# EAGLE board SPARK_PCB_2025_BRD_2 (EAGLE 9.7.0)
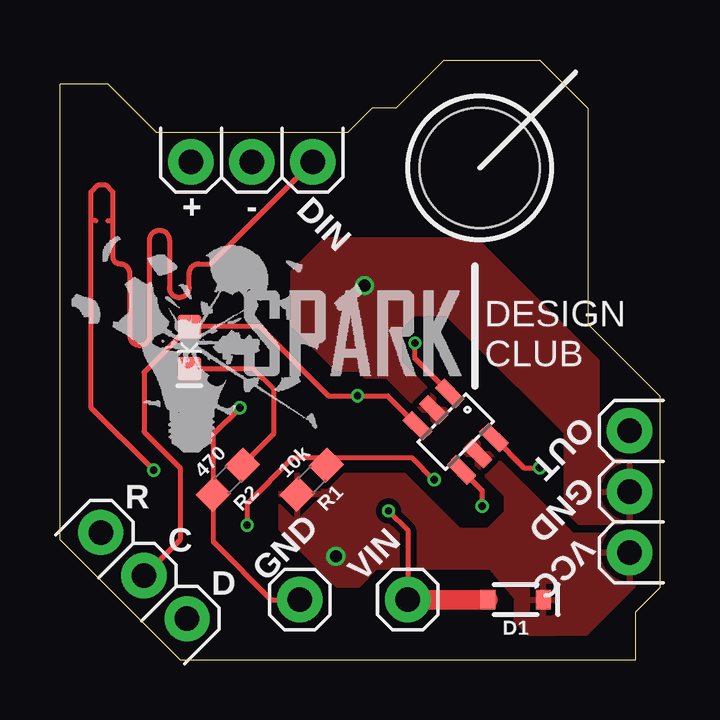
[diagram p0: board, top side]
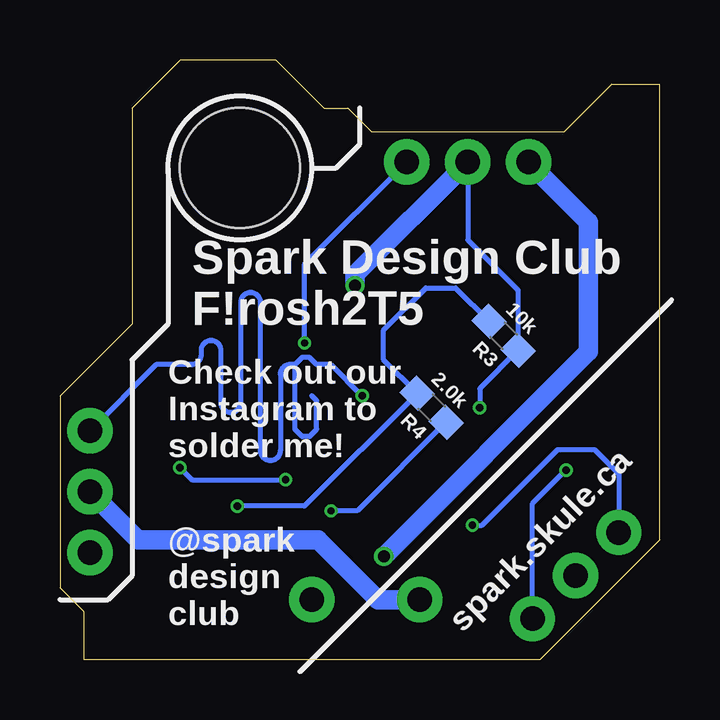
[diagram p1: board, bottom side, seen from below]

Size 25 x 25 mm. Coordinates in mm from the lower left corner, seen from the top.
Outline: 0,5 0,24 2,24 4,22 12,22 13,23 14,23 16,25 20,25 22,23 22,14 25,11 25,3 24,2 24,0 5,0 0,5
Copper layers (1*16): Top 0.035mm / dielectric 1.6mm / Bottom 0.035mm
Design rules "jlcpcb-2layers.dru": minimum track width 5mil, minimum drill 0.3mm, track to track 0.25mm, track to pad 0.15mm, pad to pad 0.15mm, via to via 5mil, smd to smd 5mil, copper to edge 0.2mm, drill to drill 6mil, minimum pad ring 10mil, minimum via ring 3mil, stop-mask expansion 4mil, vias tented up to drill 0mil, thermal gap 10mil
Holes 5 mm at 17.5,20.5

## Footprints (pad centres in the part's own frame; a part is rotated, then mirrored left to right if it is on the bottom)
SOD-323 = smd 0.63 x 0.83: A 1.15,0; C -1.15,0
LED-0603 = smd 1 x 1: A -0.877,0; C 0.877,0
SOT23-6 = smd 0.55 x 1.2: 1 -0.95,-1.3; 2 0,-1.3; 3 0.95,-1.3; 4 0.95,1.3; 5 0,1.3; 6 -0.95,1.3
1X01 = drill 1.016 pad 1.88: 1 0,0
1X03 = drill 1.016 pad 1.88: 1 -2.54,0; 2 0,0; 3 2.54,0
0603 = smd 1.1 x 1: 1 -0.85,0; 2 0.85,0

## Placement (x,y rotation side)
D1  1A/23V/620mV  [SOD-323]  19,2.5 180 top
D2  WHITE  [LED-0603]  5.4,13 270 top
IC1  ATTINY10  [SOT23-6]  16.5,9.5 225 top
J1  [1X01]  14.5,2.5 0 top
J2  [1X01]  10,2.5 0 top
J3  455-1750-1-ND  [1X03]  8,20.75 0 top
J4  455-1750-1-ND  [1X03]  23.75,7 270 top
J5  455-1750-1-ND  [1X03]  3.5,3.5 135 top
R1  10k  [0603]  10.5,7.5 225 top
R2  470  [0603]  7,7.5 225 top
R3  10k  [0603]  6.5,13.5 135 bottom
R4  2.0k  [0603]  9.5,10.5 135 bottom

## Library data of the parts
D1 = SparkFun-DiscreteSemi; PROD_ID: DIO-11623
D2 = SparkFun-LED; PROD_ID: DIO-09004
IC1 = adafruit
J1 J2 = SparkFun-Connectors
J3-J5 = SparkFun-Connectors; PROD_ID: XXX-00000
R1 R3 = SparkFun-Resistors; PROD_ID: RES-00824
R2 = SparkFun-Resistors; PROD_ID: RES-07869
R4 = SparkFun-Resistors; PROD_ID: RES-08296

## Nets
5V: D1.A J1.1 R4.1
BAT: IC1.4 R3.2 R4.2
DIN: IC1.1 J3.3 J5.1
GND: IC1.2 J2.1 J3.2 J4.2 R2.2 R3.1
LEDO: D2.A IC1.3 J4.1 J5.2
N$5: D2.C R2.1
RST: IC1.6 J5.3 R1.1
VCC: D1.C IC1.5 J3.1 J4.3 R1.2

## Tracks (layer width: path | path; a pad name or v marks a point on that pad's centre or on a via)
5V  (via drill 0.3 pad 0.55)
  Top 0.2: v13.7,6.2 14.5,5.4 J1.1
  Top 0.813: J1.1 D1.A
  Bottom 0.2: R4.1 12.6,6.2 v13.7,6.2
BAT  (via drill 0.3 pad 0.55)
  Top 0.2: IC1.4 17.6,7.06 v17.6,6.4
  Bottom 0.2: v17.6,6.4 14.8,6.4 R4.2 11.5,12.5 11.5,13.75 9.75,15.5 8.5,15.5 R3.2
DIN  (via drill 0.3 pad 0.55)
  Top 0.2: v3.9,7.9 1.3,10.5 1.3,18.3 | IC1.1 14.8,12.54 v14.8,13.2 | 1.5,18.3 1.3,18.3 | 2,18.3 2.2,18.3 | 1.3,18.3 1.3,19.5 1.6,19.8 1.9,19.8 2.2,19.5 2.2,18.3 | 2.2,18.3 2.2,16.8 arc90 2.5,16.5 arc-90 2.91,16.09 2.91,13.51 arc90 3.33,13.1 arc90 3.74,13.51 3.74,17.49 arc-90 4.15,17.9 arc-90 4.56,17.49 4.56,15.51 arc90 4.97,15.1 arc90 5.39,15.51 5.39,16.09 arc-90 5.8,16.5 6.29,16.5 J3.3
  Bottom 0.2: J5.1 5.3,6.5 v3.9,7.9 | v14.8,13.2 14.8,16.49 J3.3
GND  (via drill 0.3 pad 0.55, 0.5 pad 0.8)
  Top 0.2: J2.1 8.8,2.5 6.4,4.9 R2.2 6.4,9.4 v7.5,10.5
  Bottom 0.2: v7.5,10.5 7.5,11.3 R3.1 5.9,15.4 8,17.5 J3.2
  Bottom 0.813: v12.7,15.6 12.7,16.05 J3.2 | J4.2 21.75,5 14.25,5 11.75,2.5 J2.1
  pour Top: 22.06,8.44 22.08,8.42 22.08,5.68 23.92,5.68 23.92,8.32 23.08,8.32 23.06,8.34 22.44,8.96 22.42,8.98 22.42,12.47 17.37,17.52 11.03,17.52 9.68,16.17 9.68,13.93 11.53,12.08 12.42,12.08 12.44,12.06 12.73,11.78 13.62,11.78 13.64,11.76 15.8,9.61 16.32,10.13 16.32,10.27 14.24,12.36 14.22,12.38 14.22,13.82 14.24,13.84 14.76,14.36 14.78,14.38 16.12,14.38 16.14,14.36
  pour Top: 21.63,5.68 22.22,5.68 22.22,9.62 21.08,9.62 21.08,6.23
LEDO  (via drill 0.3 pad 0.55)
  Top 0.2: IC1.3 13.66,11 v12.4,11 11.2,11 8.32,13.88 D2.A 3.5,11.98 3.5,9.5 5,8 5,5 J5.2
  Bottom 0.2: v12.4,11 13.7,12.3 14.3,12.3 14.6,12.6 14.9,12.6 15.2,12.3 | 15.2,12.3 15.2,9.6 14.9,9.3 14.6,9.3 14.3,9.6 14.3,10.8 14.5,11 | 15.2,12.3 15.4,12.3 arc-90 15.81,11.89 15.81,8.71 arc90 16.23,8.3 arc90 16.64,8.71 16.64,14.89 arc-90 17.05,15.3 arc-90 17.46,14.89 17.46,10.71 arc90 17.88,10.3 arc90 18.29,10.71 18.29,12.89 arc-90 18.7,13.3 arc-90 19.11,12.89 19.11,12.71 arc90 19.52,12.3 20.99,12.3 J4.1
N$5
  Top 0.2: R2.1 8.9,9.4 8.9,11.3 8.08,12.12 D2.C
RST  (via drill 0.3 pad 0.55)
  Top 0.2: IC1.6 19.34,8 v20,8 | v15.6,7.5 14.7,8.4 11.4,8.4 R1.1 10.8,8.4 9.7,8.4 7.8,6.5 v7.8,5.6
  Bottom 0.2: v7.8,5.6 7.4,5.6 4.25,8.75 2.71,8.75 1.7,7.75 J5.3 | v20,8 19.5,7.5 v15.6,7.5
VCC  (via drill 0.5 pad 0.8)
  Bottom 0.813: J3.1 2.96,18.25 2.96,12.84 v11.5,4.3
  pour Top: 17.84,5.44 17.82,5.42 16.68,5.42 16.66,5.44 14.37,7.72 9.83,7.72 9.18,7.07 9.18,5.43 11.53,3.08 12.47,3.08 13.21,3.81 13.23,3.83 17.9,3.83 17.9,3.83 17.91,3.83 17.92,3.83 17.93,3.82 17.93,3.82 17.94,3.82 17.95,3.81 17.95,3.81 17.96,3.81 17.96,3.8 17.97,3.79 17.97,3.79 20.24,1.08 21.97,1.08 23.92,3.03 23.92,5.22 21.38,5.22 21.36,5.24 17.27,9.32 17.13,9.32 16.68,8.87 16.68,8.73 18.56,6.84 18.58,6.82 18.58,6.18 18.56,6.16
  pour Top: 19.54,1.1 20.71,1.1 19,2.41 19,1.64
(copper drawn outside any net)
  shapes: Top area x1

## Text on the board
tPlace: + | - | DIN | DESIGN / CLUB | OUT | GND | R | C | VCC | D | GND | VIN
bNames: Spark Design Club / F\!rosh2T5 | Check out our / Instagram to / solder me! | @spark / design / club | spark.skule.ca